# EAGLE board MagusExpander (EAGLE 9.1.3)
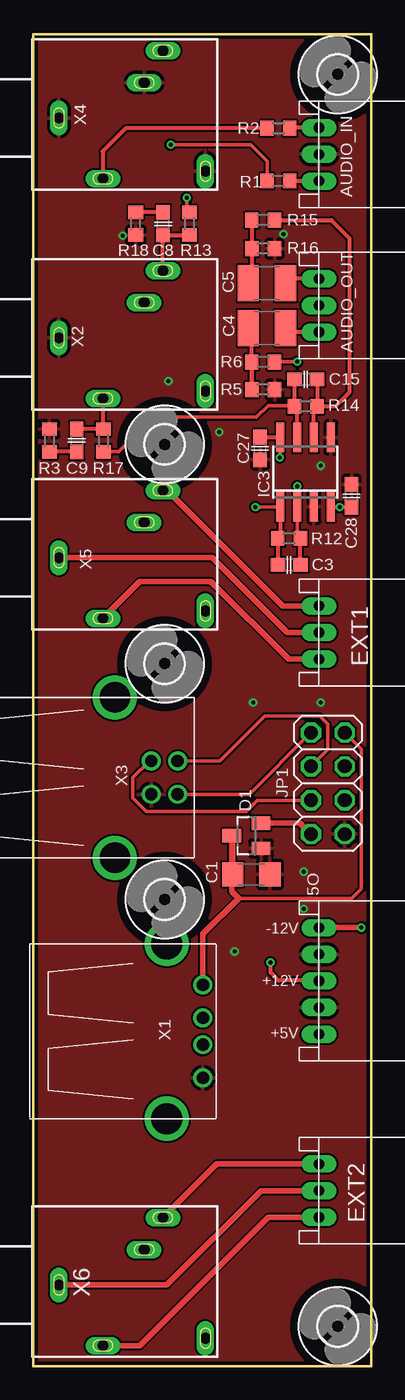
[diagram p0: board, top side]
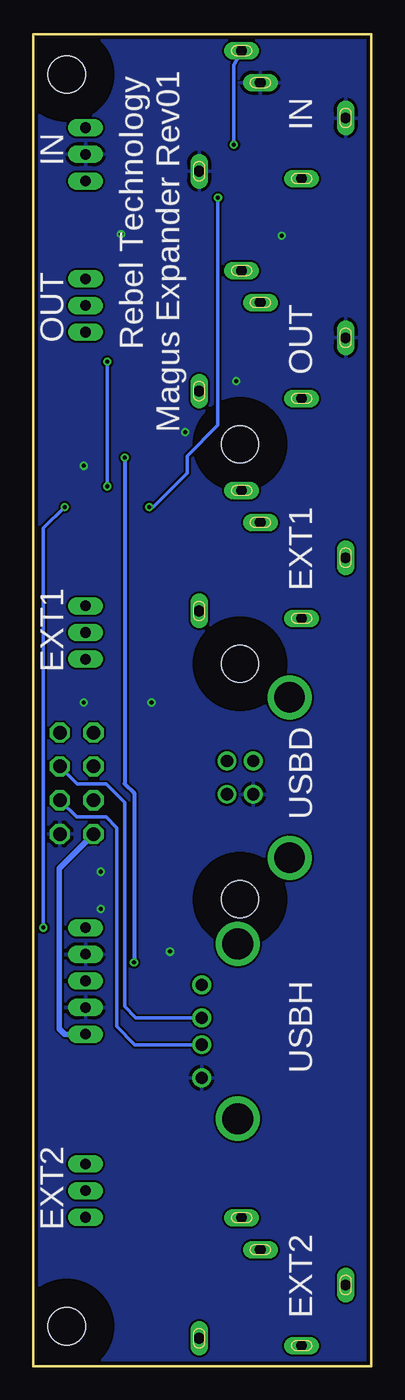
[diagram p1: board, bottom side, seen from below]

Size 25.37 x 100 mm. Coordinates in mm from the lower left corner, seen from the top.
Outline: 25.37,100 25.37,0 0,0 0,100 25.37,100
Copper layers (1*16): Top 0.035mm / dielectric 1.5mm / Bottom 0.035mm
Design rules "SeeedStudio_2layer_DRU_no_angle_20140221": minimum track width 6mil, minimum drill 12mil, track to track 6mil, track to pad 6mil, pad to pad 6mil, via to via 6mil, smd to smd 0mil, copper to edge 10mil, drill to drill 10mil, minimum pad ring 10mil, minimum via ring 6mil, stop-mask expansion 2mil, vias tented up to drill 100mil, thermal gap 10mil
Net classes: 1 power: width 0.178 mm, drill 0.305 mm, clearance 0.178 mm to class 0, clearance 0.178 mm

## Footprints (pad centres in the part's own frame; a part is rotated, then mirrored left to right if it is on the bottom)
CON-JST_PH_5W = drill 0.8 long: P1 0,0; P2 -2,0; P3 -4,0; P4 -6,0; P5 -8,0
CON-JST_PH_3W = drill 0.8 long: P1 0,0; P2 -2,0; P3 -4,0
C1206 = smd 1.6 x 1.8: 1 -1.4,0; 2 1.4,0
C0603 = smd 1.1 x 1: 1 -0.85,0; 2 0.85,0
C1210 = smd 1.6 x 2.7: 1 -1.4,0; 2 1.4,0
SOT23 = smd 1 x 1.4: 1 -0.95,-1.1; 2 0.95,-1.1; 3 0,1.1
SO08 = smd 0.6 x 2.2: 1 -1.905,-2.6; 2 -0.635,-2.6; 3 0.635,-2.6; 4 1.905,-2.6; 5 1.905,2.6; 6 0.635,2.6; 7 -0.635,2.6; 8 -1.905,2.6
2X04 = drill 1.016 octagon: 1 -3.81,-1.27; 2 -3.81,1.27; 3 -1.27,-1.27; 4 -1.27,1.27; 5 1.27,-1.27; 6 1.27,1.27; 7 3.81,-1.27; 8 3.81,1.27
R0603 = smd 1 x 1.1: 1 -0.85,0; 2 0.85,0
2,8 = hole 2.8: 0,0
USB-A-H = drill 0.914: D+ 2.718,-1.003; D- 2.718,1.003; GND 2.718,-3.493; VBUS 2.718,3.493 | drill 2.311: P$5 0,-6.566; P$6 0,6.566
1503_09 = drill 0.8 pad 1.2 long: 1 0,-2.1; 2 -4.55,-5.4; 3 5.05,-9.9; 4 -4,-13.1; 5 2.65,-8.5
USB-B-H = drill 0.914: D+ 0,1.25; D- 1.981,1.25; GND 0,-1.25; VBUS 1.981,-1.25 | drill 2.286: P$1 -2.718,-6.02; P$2 -2.718,6.02

## Placement (x,y rotation side)
5O  CON-JST_PH_5W  [CON-JST_PH_5W]  21.45,24.93 270 top
AUDIO_IN  CON-JST_PH_3W  [CON-JST_PH_3W]  21.45,89 270 top
AUDIO_OUT  CON-JST_PH_3W  [CON-JST_PH_3W]  21.45,77.65 270 top
C1  10u  [C1206]  16.37,36.93 0 top
C3  750p  [C0603]  19.21,60.17 0 top
C4  1u Polyester  [C1210]  17.54,77.95 180 top
C5  1u Polyester  [C1210]  17.54,81.32 180 top
C8  47n  [C0603]  9.75,85.79 90 top
C9  47n  [C0603]  3.26,69.51 270 top
C15  750p  [C0603]  20.45,74.1 0 top
C27  100n  [C0603]  17.02,68.92 270 top
C28  100n  [C0603]  23.89,65.36 90 top
D1  BAT54S  [SOT23]  16,39.83 90 top
EXT1  CON-JST_PH_3W  [CON-JST_PH_3W]  21.45,53.09 270 top
EXT2  CON-JST_PH_3W  [CON-JST_PH_3W]  21.45,11.18 270 top
IC3  RC4560  [SO08]  20.43,67.14 0 top
JP1  [2X04]  22.11,43.77 270 top
R1  22k  [R0603]  18.4,89 180 top
R2  22k  [R0603]  18.4,92.96 180 top
R3  10R  [R0603]  1.22,69.51 270 top
R5  100k  [R0603]  17.25,73.33 180 top
R6  22k  [R0603]  17.25,75.4 180 top
R12  10k  [R0603]  19.21,62.16 0 top
R13  22R  [R0603]  11.72,85.79 90 top
R14  10k  [R0603]  20.45,72.07 0 top
R15  22k  [R0603]  17.25,86.06 180 top
R16  100k  [R0603]  17.25,83.92 180 top
R17  22R  [R0603]  5.26,69.52 270 top
R18  10R  [R0603]  7.69,85.79 90 top
U$1  [2,8]  22.86,3 90 top
U$2  [2,8]  9.86,69.22 90 top
U$3  [2,8]  9.86,35.06 90 top
U$4  [2,8]  9.86,52.75 90 top
U$5  [2,8]  22.86,97 90 top
X1  [USB-A-H]  10.02,25.15 0 top
X2  1503_09  [1503_09]  -0.17,77.22 90 top
X3  [USB-B-H]  8.85,44.2 0 top
X4  1503_09  [1503_09]  -0.17,93.73 90 top
X5  1503_09  [1503_09]  -0.17,60.71 90 top
X6  1503_09  [1503_09]  -0.17,6.1 90 top

## Library data of the parts
5O AUDIO_IN AUDIO_OUT C1 C3-C5 C8 C9 C15 C27 C28 EXT1 EXT2 = Rebel
D1 = diode
IC3 = linear
JP1 = pinhead
R1-R3 R5 R6 R12-R18 = resistor
U$1-U$5 = holes
X1 X3 = con-usb-3
X2 X4-X6 = con-lumberg; OC_FARNELL: 1243244; OC_NEWARK: unknown

## Nets
+5V: 5O.P1 D1.2 JP1.7
+12V: 5O.P3 C27.1 IC3.8
-12V: 5O.P5 C28.1 IC3.4
EXT_USB_D_D+: JP1.5 X3.D+
EXT_USB_D_D-: JP1.3 X3.D-
EXT_USB_D_VBUS: JP1.1 X3.VBUS
EXT_USB_H_D+: JP1.6 X1.D+
EXT_USB_H_D-: JP1.4 X1.D-
EXT_USB_H_VBUS: C1.1 D1.3 JP1.2 X1.VBUS
GND: 5O.P2 5O.P4 AUDIO_IN.P2 C1.2 C27.2 C28.2 D1.1 IC3.3 IC3.5 JP1.8 R3.1 R5.1 R16.1 R18.1 X1.GND X2.1 X3.GND X4.1 X4.4 X4.5
IN_L: R1.2 X4.3
IN_R: R2.2 X4.2
L_OUT: C8.1 R13.1 X2.3
N$1: C15.2 IC3.6 R14.2 R15.1
N$2: C15.1 IC3.7 R14.1 R17.2
N$3: C3.2 IC3.2 R6.1 R12.2
N$4: C5.2 R15.2 R16.2
N$5: AUDIO_IN.P3 R2.1
N$6: AUDIO_IN.P1 R1.1
N$7: EXT1.P1 X5.2
N$8: C4.2 R5.2 R6.2
N$10: EXT2.P3 X6.3
N$11: EXT2.P1 X6.2
N$12: C9.2 R3.2
N$13: EXT2.P2 X6.1
N$14: EXT1.P3 X5.3
N$15: EXT1.P2 X5.1
N$19: C3.1 IC3.1 R12.1 R13.2
N$21: C8.2 R18.2
OUT_L: AUDIO_OUT.P1 C4.1
OUT_R: AUDIO_OUT.P3 C5.1
R_OUT: C9.1 R17.1 X2.2

## Tracks (layer width: path | path; a pad name or v marks a point on that pad's centre or on a via)
+5V
  Top 0.406: JP1.7 20.02,40.78 D1.2
  Bottom 0.406: JP1.7 23.41,37.39 23.41,25.33 23,24.93 5O.P1
+12V  (via drill 0.3)
  Top 0.254: IC3.8 18.52,68.24 v18.5,68.22
  Top 0.305: IC3.8 17.05,69.74 C27.1 | v17.8,30.33 17.8,29.56 18.41,28.96 21.41,28.96 5O.P3
  Bottom 0.305: v18.5,68.22 18.5,43.73 17.8,43.03 v17.8,30.33
-12V  (via drill 0.3)
  Top 0.254: C28.1 v23,64.51 | IC3.4 22.36,64.51 v23,64.51 | v23,64.51 v23,64.52
  Top 0.406: v24.61,32.93 5O.P5
  Bottom 0.254: v23,64.52 24.61,62.92 v24.61,32.93
EXT_USB_D_D+
  Top 0.254: JP1.5 16.82,42.5 15.98,41.66 8.49,41.66 7.48,42.68 7.48,44.2 8.72,45.45 X3.D+
EXT_USB_D_D-
  Top 0.254: JP1.3 22.11,46.31 22.11,48.23 21.5,48.83 17.37,48.83 13.98,45.45 X3.D-
EXT_USB_D_VBUS
  Top 0.254: JP1.1 16.21,42.95 X3.VBUS
EXT_USB_H_D+
  Bottom 0.254: X1.D+ 17.75,24.15 19.11,25.5 19.11,40.43 19.91,41.23 22.11,41.23 JP1.6
EXT_USB_H_D-
  Bottom 0.254: X1.D- 17.66,26.15 18.5,27 18.5,42.33 19.91,43.73 22.07,43.73 JP1.4
EXT_USB_H_VBUS
  Top 0.254: 15.41,35.13 23.91,35.13 24.61,35.83 24.61,46.35 JP1.2
  Top 0.406: C1.1 14.96,39.76 D1.3 14.89,35.64 15.41,35.13 12.73,32.46 X1.VBUS
GND  (via drill 0.3)
  other vias: 20.3,34.33 20.3,37.13 15.11,31.13 21.57,49.83 16.5,49.83 21.57,67.61 13.96,70.15 10.14,73.96 18.78,85.01 6.72,84.88
  pour Top: 26.48,-7.06 -4.94,-7.06 -4.94,100.75 26.48,100.75
  pour Bottom: 26.75,-7.33 -4.94,-7.33 -4.94,101.75 26.75,101.75
IN_L  (via drill 0.3)
  Top 0.254: R1.2 17.55,90.48 16.3,91.72 v10.3,91.72
  Bottom 0.254: v10.3,91.72 10.3,97.69 X4.3
IN_R
  Top 0.305: R2.2 6.94,92.96 5.21,91.22 5.21,88.69 X4.2
L_OUT
  Top 0.305: X2.3 9.72,84.92 C8.1 11.67,84.94 R13.1
N$1
  Top 0.305: R15.1 22.37,86.06 23.71,84.72 23.71,73.12 22.65,72.07 R14.2 | IC3.6 21.06,71.84 R14.2 | C15.2 R14.2
N$2
  Top 0.254: R17.2 6.41,68.67 8.99,71.25 16.75,71.25 17.64,72.14 19.43,72.14 19.55,72.02 R14.1
  Top 0.305: IC3.7 19.79,71.87 R14.1 C15.1
N$3  (via drill 0.3)
  Top 0.254: R6.1 18.17,75.42 v19.8,75.42 | R12.2 arc-90 19.8,62.41 19.8,64.53 IC3.2 v19.8,66.07
  Top 0.305: C3.2 R12.2
  Bottom 0.254: v19.8,75.42 v19.8,66.07
N$4
  Top 0.305: R15.2 R16.2 16.41,80.72 16.3,80.62 16.3,81.15 C5.2
N$5
  Top 0.305: AUDIO_IN.P3 19.28,93 R2.1
N$6
  Top 0.305: AUDIO_IN.P1 R1.1
N$7
  Top 0.406: X5.2 8,58.93 13.32,58.93 19.16,53.09 EXT1.P1
N$8
  Top 0.305: R6.2 16.4,75.31 16.39,75.3 R5.2 16.41,77.68 C4.2
N$10
  Top 0.406: EXT2.P3 13.76,15.18 X6.3
N$11
  Top 0.406: EXT2.P1 17.64,11.18 8.01,1.55 X6.2
N$12
  Top 0.305: C9.2 R3.2
N$13
  Top 0.406: X6.1 10.02,6.1 17.09,13.18 EXT2.P2
N$14
  Top 0.406: EXT1.P3 18.71,57.09 13.83,61.98 10.04,65.76 X5.3
N$15
  Top 0.406: EXT1.P2 19.06,55.09 13.44,60.71 X5.1
N$19  (via drill 0.3)
  Top 0.254: R13.2 11.51,86.48 v11.51,87.72 v11.51,87.73 | v16.68,64.52 18.51,64.52 IC3.1
  Top 0.305: IC3.1 18.52,62.43 R12.1 C3.1
  Bottom 0.254: v11.51,87.73 11.51,70.65 13.83,68.33 13.83,67.06 16.37,64.52 v16.68,64.52
N$21
  Top 0.305: C8.2 R18.2
OUT_L
  Top 0.305: AUDIO_OUT.P1 19.23,77.65 C4.1
OUT_R
  Top 0.305: AUDIO_OUT.P3 19.27,81.65 C5.1
R_OUT
  Top 0.305: C9.1 3.37,70.37 R17.1 5.23,70.4 X2.2

## Text on the board
tPlace: -12V | +12V | +5V
bPlace: Magus Expander Rev01 | Rebel Technology | IN | IN | OUT | OUT | EXT1 | EXT1 | USBD | USBH | EXT2 | EXT2